# Altium PCB FreidoraAireCuki.PcbDoc
Units mil, origin at the board's own origin, x right, y up, seen from the top; angles counter-clockwise.
Board outline 3650 x 2850 mil, 2 copper layers (Top Layer, Bottom Layer); 52 components, 63 nets, 201 pads, 0 vias.
Unrouted connection lines stored in the file: 100.
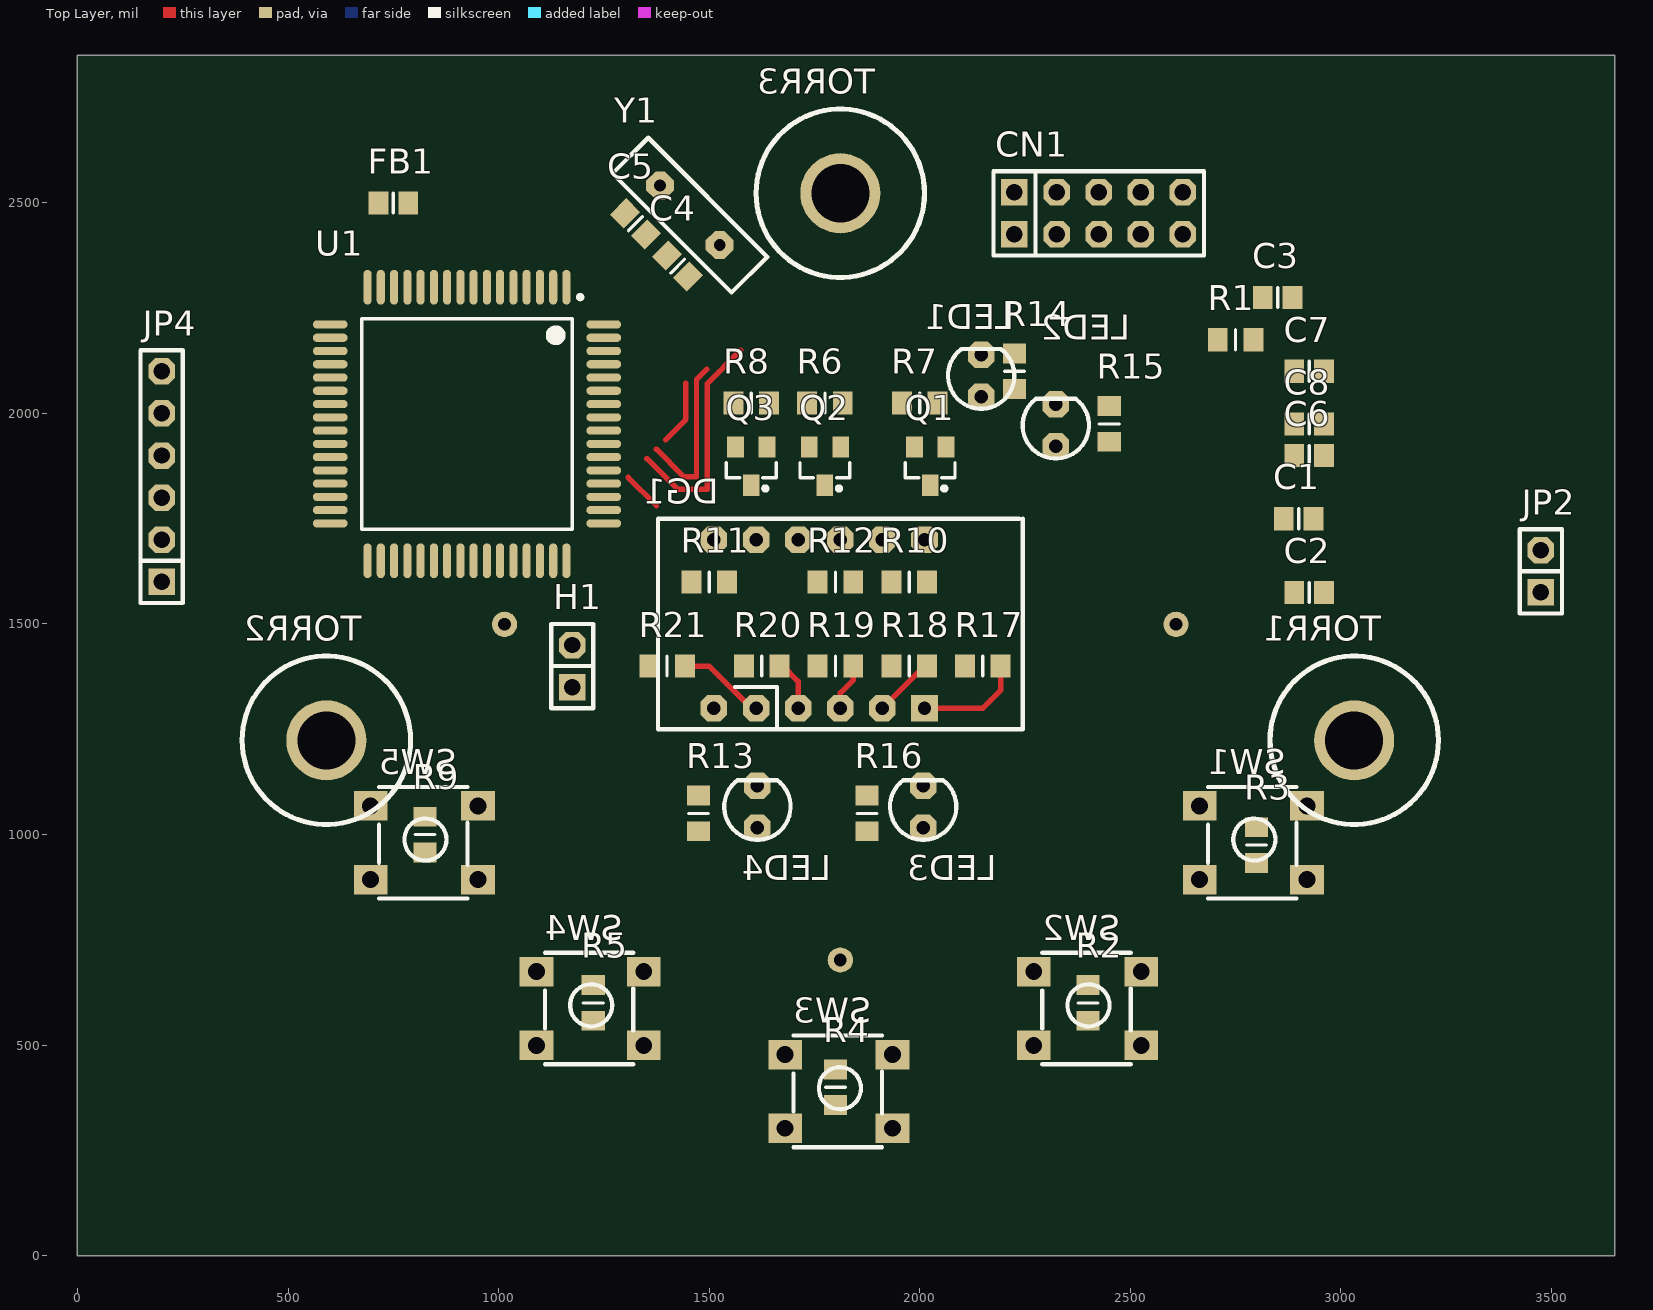
[diagram p0: Top Layer view]
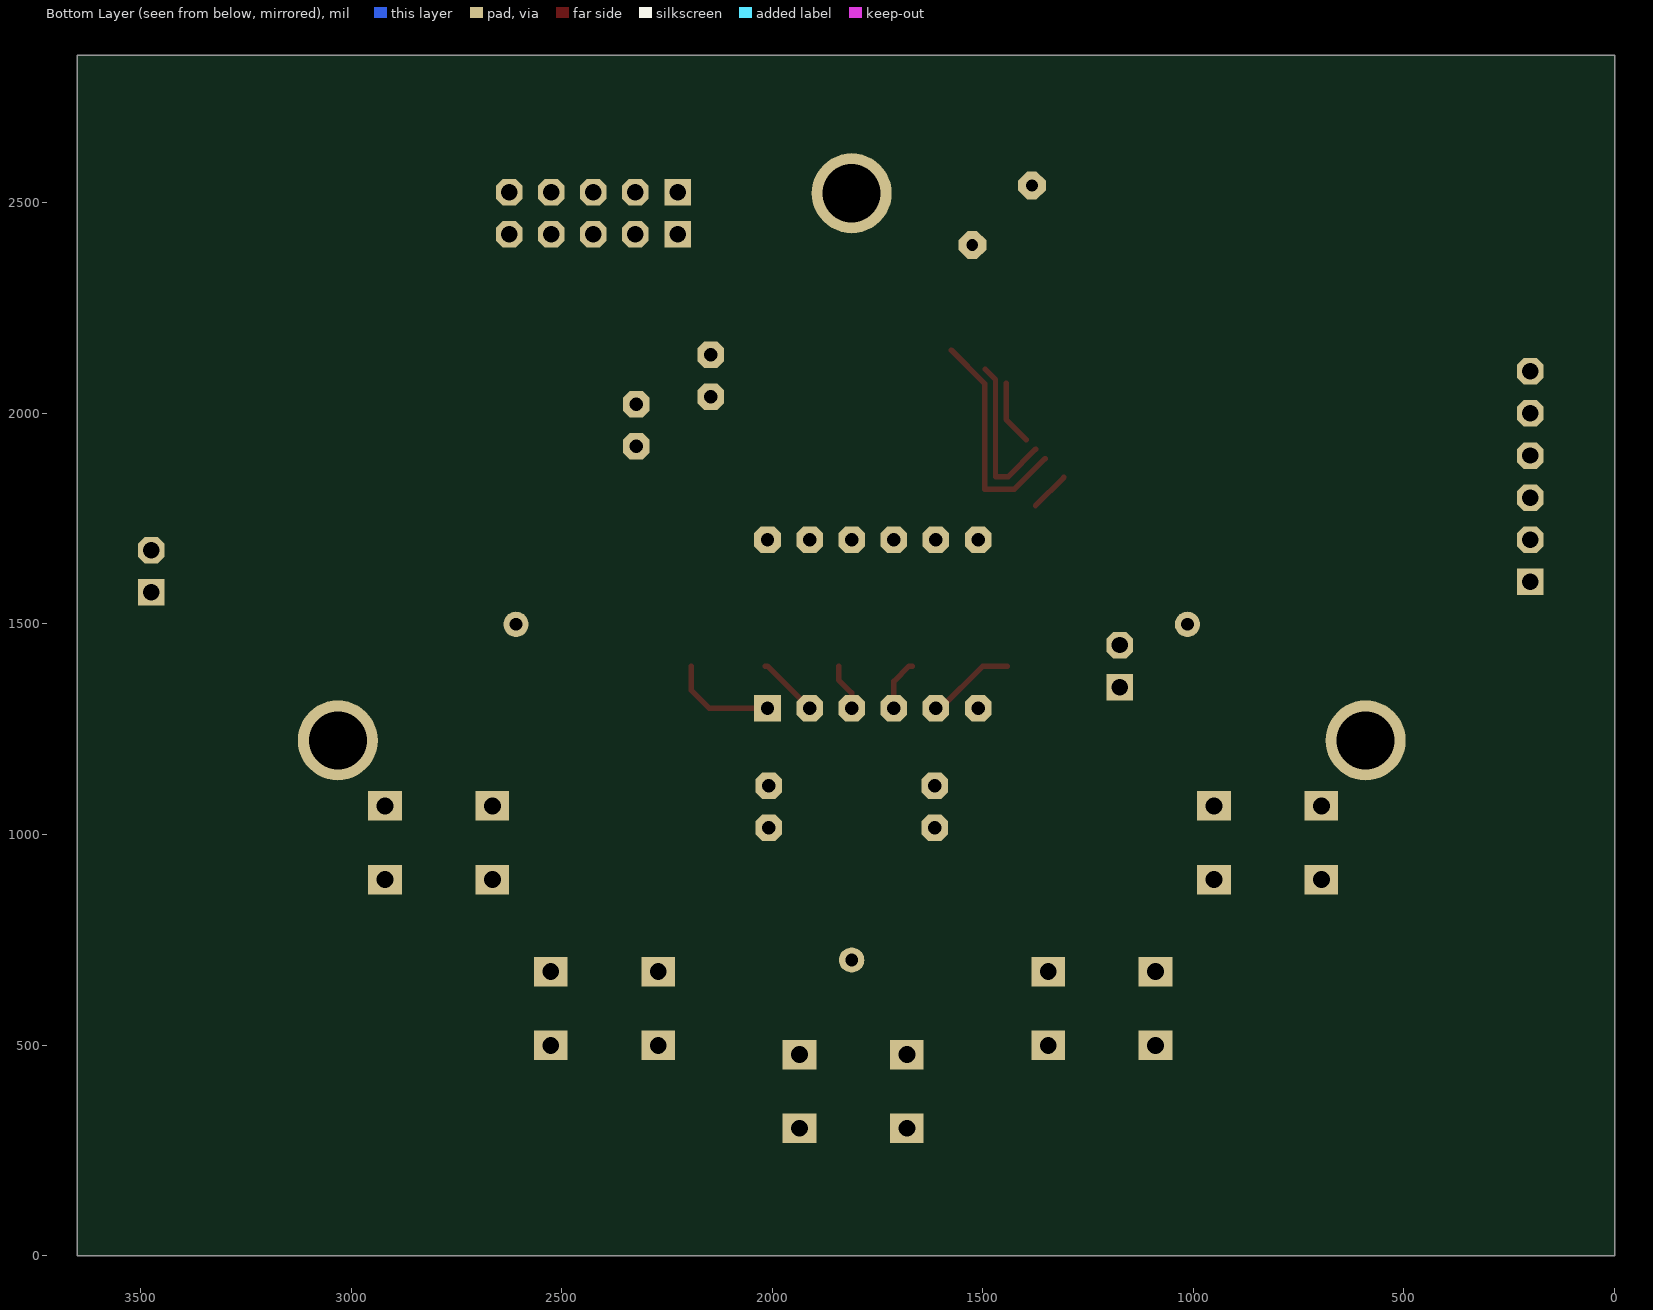
[diagram p1: Bottom Layer view, seen from below]

## Layer stack, top to bottom
Top Solder: solder mask 0.4, Solder Resist, Dk 3.5
Top Layer: signal copper 1.4
Dielectric1: dielectric 12.6, FR-4, Dk 4.8
Bottom Layer: signal copper 1.4
Bottom Solder: solder mask 0.4, Solder Resist, Dk 3.5

## Board outline
0,0 3650,0 3650,2850 0,2850

## Design rules (kind name [scope] priority, off if disabled: settings)
Clearance POLIGONOS [InPoly] p1: gap=20
Clearance [All] p2: gap=12
Clearance Clearance_1 [All] p3 off: gap=10
ComponentClearance [All] p1 off: gap=10 collisioncheckmode=3 verticalgap=10 showdistances=FALSE
FabricationTestPointUsage TestPointUsage [All] p1 off: valid=0 allowmultiple=FALSE
FabricationTestpoint Testpoint [All] p1: side=3 testpointundercomponent=TRUE minsize=40 maxsize=100 preferedsize=60 minholesize=0 maxholesize=40 preferedholesize=32 testpointgrid=1 allowsidetop=TRUE allowsidebottom=TRUE usegrid=TRUE gridtolerance=0.01
HoleSize [All] p1: absolutevalues=TRUE maxlimit=200 minlimit=1 maxpercent=80.000 minpercent=20.000
MinimumSolderMaskSliver [All] p1 off: minsoldermaskwidth=10
PlaneConnect [All] p1: planeconnectstyle=Relief reliefexpansion=20 reliefentries=4 reliefconductorwidth=14 reliefairgap=10
PolygonConnect [All] p1: connectstyle=Relief reliefconductorwidth=10 reliefentries=4 polygonreliefangle="90 Angle" airgapwidth=10
RoomDefinition FreidoraAireCuki [InComponentClass('FreidoraAireCuki')] p1: confinementstyle=ConfineIn formatcopy=TRUE lockcomponents=FALSE outline -200,-225 3825,-225 3825,2950 -200,2950
RoutingCorners [All] p1: cornerstyle=45-Degree minsetback=25 maxsetback=100
RoutingLayers [All] p1: top layer_v5=FALSE bottom layer_v5=FALSE
RoutingPriority [All] p1: routingpriority=2
RoutingVias [All] p1: holewidth=28 width=50 viastyle="Through Hole" minholewidth=28 minwidth=50 maxholewidth=28 maxwidth=55
ShortCircuit [All] p1 off: allowed=FALSE
SilkToSilkClearance [All] p1 off: silktosilkclearance=10
SilkToSolderMaskClearance SilkscreenOverComponentPads [IsPad] p1 off: minsilkscreentomaskgap=10 clearancetoexposedcopper=TRUE
SolderMaskExpansion [All] p1: expansion=4
Width "Width 39" [All] p1 off: maxlimit=300 minlimit=13 preferedwidth=39
Width "Width 96" [All] p2 off: maxlimit=300 minlimit=12 preferedwidth=96
Width "Width 19" [All] p3 off: maxlimit=300 minlimit=12 preferedwidth=19
Width "Width 300" [All] p4 off: maxlimit=300 minlimit=10 preferedwidth=300
Width "Width 12" [All] p5 off: maxlimit=300 minlimit=10 preferedwidth=12
Width "Width 65" [All] p6 off: maxlimit=300 minlimit=10 preferedwidth=65
Width "Width 150" [All] p7 off: maxlimit=300 minlimit=10 preferedwidth=150
Width "Width 26" [All] p8 off: maxlimit=300 minlimit=10 preferedwidth=26
Width "Width 13" [All] p9: maxlimit=300 minlimit=10 preferedwidth=13
Width "Width 52" [All] p10 off: maxlimit=300 minlimit=10 preferedwidth=52
18 further rules are at their usual default settings.

## Components (designator, comment, footprint, x,y, rotation, side; value= is the part's Value field where it differs from the comment)
C1 "100nF" C-0805_N 2900,1750 r0 top
C2 "100nF" C-0805_N 2925,1575 r0 top
C3 "1uF" C-0805_N 2850,2275 r0 top
C4 "22pF" C-0805_N 1425,2350 r135 top
C5 "22pF" C-0805_N 1325,2450 r315 top
C6 "100nF" C-0805_N 2925,1900 r0 top
C7 "100nF" C-0805_N 2925,2100 r0 top
C8 "100nF" C-0805_N 2925,1975 r0 top
CN1 "HEADER 2x5" SIP2X5 2225,2425 r180 top
DG1 "5121CG-HG" DIGIT_3_400 2011.42,1300 r180 top
FB1 "Ferrite bead" C-0805_N 750,2500 r0 top
H1 "NTC" SIP2 1175,1350 r90 top
JP2 "UART1" SIP2 3475,1575 r90 top
JP4 "HEADER 6" SIP6 200,1600 r90 top
LED1 "LED" LED3MM 2146.06,2089.76 r180 top
LED2 "LED" LED3MM 2323.23,1971.65 r180 top
LED3 "LED" LED3MM 2008.27,1066.14 r180 top
LED4 "LED" LED3MM 1614.57,1066.14 r180 top
Q1 "BC847" SOT23_BOTTOM 2025,1875 r270 top
Q2 "BC847" SOT23_BOTTOM 1775,1875 r270 top
Q3 "BC847" SOT23_BOTTOM 1600,1875 r270 top
R1 "10k" R-0805_N_WAVE 2750,2175 r0 top
R2 "RES1" 0805BOTTOM 2400,600 r90 top
R3 "RES1" 0805BOTTOM 2800,975 r90 top
R4 "RES1" 0805BOTTOM 1800,400 r90 top
R5 "RES1" 0805BOTTOM 1225,600 r90 top
R6 "2K7" R-0805_N_WAVE 1775,2025 r0 top
R7 "4K7" R-0805_N_WAVE 2000,2025 r180 top
R8 "2K7" R-0805_N_WAVE 1600,2025 r0 top
R9 "RES1" 0805BOTTOM 825,1000 r90 top
R10 "RES1" 0805BOTTOM 1975,1600 r180 top
R11 "RES1" 0805BOTTOM 1500,1600 r180 top
R12 "RES1" 0805BOTTOM 1800,1600 r180 top
R13 "RES1" 0805BOTTOM 1475,1050 r90 top
R14 "RES1" 0805BOTTOM 2225,2100 r90 top
R15 "RES1" 0805BOTTOM 2450,1975 r90 top
R16 "RES1" 0805BOTTOM 1875,1050 r90 top
R17 "RES1" 0805BOTTOM 2150,1400 r0 top
R18 "RES1" 0805BOTTOM 1975,1400 r0 top
R19 "RES1" 0805BOTTOM 1800,1400 r0 top
R20 "RES1" 0805BOTTOM 1625,1400 r0 top
R21 "RES1" 0805BOTTOM 1400,1400 r0 top
SW1 "-" ZIPPY-TS 2919.68,1068.11 r180 top
SW2 "+" ZIPPY-TS 2525.98,674.41 r180 top
SW3 "ON/OFF" ZIPPY-TS 1935.43,477.56 r180 top
SW4 "TIEMPO" ZIPPY-TS 1344.88,674.41 r180 top
SW5 "MODO" ZIPPY-TS 951.18,1068.11 r180 top
TORR1 "" TORRETA 3031.89,1223.62 r180 top
TORR2 "" TORRETA 590.94,1223.62 r180 top
TORR3 "" TORRETA 1811.42,2522.83 r180 top
U1 "MKE02Z64VQH4" QFP64 925,1975 r270 top
Y1 "4-20MHz" XTAL1 1525,2400 r135 top

## Footprints (in the part's own frame and the unit in brackets; to place one, negate y for a bottom-side part, rotate by r counter-clockwise, add the part's x,y. Pads: shape width x height; smd on the part's side, far side on the other; paste and mask are expansions set on the pad)
0805BOTTOM [mm] "Chip Resistor, Body 2.0x1.2mm, IPC Medium Density"
  rect 1.2x1.4 smd: 1(-1.075,0) 2(1.075,0)
  silkscreen extent 0,-0.6 0,0.6, body extent -1.07,-0.7 1.07,0.7, height 0.7
C-0805_N [mm] "Chip Capacitor, Body 2.0x1.2mm, IPC Medium Density"
  rect 1.2x1.4 smd: 1(-0.9,0) 2(0.9,0)
  silkscreen extent 0,-0.6 0,0.6, body extent -1.1,-0.72 1.1,0.73, height 1.34
DIGIT_3_400 [mil] "7 segment single digit 400"
  rect 63x63 hole 32: 1(0,0)
  oct 63x63 hole 32: 2(100,0) 3(200,0) 4(300,0) 5(400,0) 6(500,0) 7(500,-400) 8(400,-400) 9(300,-400) 10(200,-400) 11(100,-400) 12(0,-400)
  silkscreen extent -233,-450 633,50
LED3MM [mil]
  oct 63x63 hole 32: 1(0,50) 2(0,-50)
  silkscreen extent -79,-63 79,79, body extent -79,-66 79,79, height 256
QFP64 [mm] "QFP, 64-Leads, Body 14x14mm, Pitch 0.8mm, IPC Medium Density"
  oval 2.1x0.489 smd: 1(-8.25,6) 2(-8.25,5.2) 3(-8.25,4.4) 4(-8.25,3.6) 5(-8.25,2.8) 6(-8.25,2) 7(-8.25,1.2) 8(-8.25,0.4) 9(-8.25,-0.4) 10(-8.25,-1.2) 11(-8.25,-2) 12(-8.25,-2.8) 13(-8.25,-3.6) 14(-8.25,-4.4) 15(-8.25,-5.2) 16(-8.25,-6) 33(8.25,-6) 34(8.25,-5.2) 35(8.25,-4.4) 36(8.25,-3.6) 37(8.25,-2.8) 38(8.25,-2) 39(8.25,-1.2) 40(8.25,-0.4) 41(8.25,0.4) 42(8.25,1.2) 43(8.25,2) 44(8.25,2.8) 45(8.25,3.6) 46(8.25,4.4) 47(8.25,5.2) 48(8.25,6)
  oval 0.489x2.1 smd: 17(-6,-8.25) 18(-5.2,-8.25) 19(-4.4,-8.25) 20(-3.6,-8.25) 21(-2.8,-8.25) 22(-2,-8.25) 23(-1.2,-8.25) 24(-0.4,-8.25) 25(0.4,-8.25) 26(1.2,-8.25) 27(2,-8.25) 28(2.8,-8.25) 29(3.6,-8.25) 30(4.4,-8.25) 31(5.2,-8.25) 32(6,-8.25) 49(6,8.25) 50(5.2,8.25) 51(4.4,8.25) 52(3.6,8.25) 53(2.8,8.25) 54(2,8.25) 55(1.2,8.25) 56(0.4,8.25) 57(-0.4,8.25) 58(-1.2,8.25) 59(-2,8.25) 60(-2.8,8.25) 61(-3.6,8.25) 62(-4.4,8.25) 63(-5.2,8.25) 64(-6,8.25)
  silkscreen extent -7.77,-6.35 6.35,6.95, body extent -7.9,-7.9 7.9,7.9, height 2.9
R-0805_N_WAVE [mm] "Chip Resistor, Body 2.0x1.2mm, IPC Medium Density, Wave soldering"
  rect 1.2x1.4 smd: 1(-1.075,0) 2(1.075,0)
  silkscreen extent 0,-0.6 0,0.6, body extent -1.1,-0.67 1.1,0.68, height 0.69
SIP2 [mil]
  rect 63x63 hole 39: 1(0,0)
  oct 63x63 hole 39: 2(100,0)
  silkscreen extent -50,-50 150,50
SIP2X5 [mil]
  rect 63x63 hole 39: 1(0,0) 2(0,-100)
  oct 63x63 hole 39: 3(-100,0) 4(-100,-100) 5(-200,0) 6(-200,-100) 7(-300,0) 8(-300,-100) 9(-400,0) 10(-400,-100)
  silkscreen extent -450,-150 50,50, body extent -450,-148 50,48, height 336
SIP6 [mil]
  rect 63x63 hole 39: 1(0,0)
  oct 63x63 hole 39: 2(100,0) 3(200,0) 4(300,0) 5(400,0) 6(500,0)
  silkscreen extent -50,-50 550,50
SOT23_BOTTOM [mm] "SOT23, 3-Leads, Body 2.9x1.3mm, Pitch 0.95mm, Lead Span 2.3mm - Reverse Pinning, IPC Medium Density"
  rect 1.25x1 smd: 1(-1.15,0.95) 2(-1.15,-0.95)
  rect 1.3x1 smd: 3(1.17,0)
  silkscreen extent -0.2,-1.5 1.47,1.5, body extent -0.7,-1.5 0.7,1.5, height 1.1
TORRETA [mil]
  round 190 hole 137.8: 0(0,0)
  silkscreen extent -200,-200 200,200
XTAL1 [mil]
  oct 63x63 hole 28: 1(0,0) 2(200,0)
  silkscreen extent -100,-60 300,60
ZIPPY-TS [mil]
  rect 80x70 hole 40: 1(0,175) 2(0,0) 3(255,0) 4(255,175)
  silkscreen extent 25,-45 235,220

## Part data
C1 C2 C3 C4 C5 C6 C7 C8: library part CAP, "Non polarized capacitor"
CN1: library part "HEADER 5X2"
DG1: library part "DIGITO x 3 400", "Dígito 0.52' cátodo común verde"
H1 JP2: library part "HEADER 2"
Q1 Q2 Q3: "NPN transistor bipolar"
R1: library part "Res SMD 0805", "Resistor SMD 0805"
R2 R3 R4 R5 R9 R10 R11 R12 R13 R14 R15 R16 R17 R18 R19 R20 R21: "Resistor"
R6 R7 R8: library part RES, "Resistor"
SW1 SW2 SW3 SW4 SW5: library part TECLA
TORR1 TORR2 TORR3: library part TORRETA
U1: "IC MCU 32BIT 64KB FLASH 64QFP"
Y1: library part CRYSTAL, "CRYSTAL"

## Free pads (board coordinates)
  round 60 hole 30: 0(1014.17,1499.21) 0(1811.42,701.97) 0(2608.66,1499.21)

## Nets (pads, with @x,y where several pads share a name; then routed paths per layer and width w, separated by ;. In a path a pad name is that pad's centre, name@x,y a point inside that pad or via, vN(x,y) a via of type N, cw(c..) or ccw(c..) an arc to the next point about the centre after c; other vN are vias at no path point)
AGND: FB1.2
BUZZER: JP4.3 U1.57
DIG1: DG1.12 Q1.3
DIG2: DG1.9 Q2.3
DIG3: DG1.8 Q3.3
DIGITO1: R7.1 U1.20
DIGITO2: R6.1 U1.21
DIGITO3: R8.1 U1.25
FAN: JP4.4 U1.56
GND: C1.2 C2.2 C3.2 C4.1 C5.1 C6.2 C7.2 C8.2 CN1.3 CN1.5 FB1.1 JP4.1 LED1.2 LED2.2 LED3.2 LED4.2 Q1.2 Q2.2 Q3.2 SW1.2 SW2.2 SW3.2 SW4.2 SW5.2 U1.9 U1.10 U1.13 U1.40
HEAT: JP4.5 U1.55
LED1: R14.2 U1.26
LED2: R15.2 U1.5
LED3: R16.2 U1.16
LED4: R13.2 U1.17
NetC4_2: C4.2 U1.11 Y1.1
NetC5_2: C5.2 U1.12 Y1.2
NetDG1_1: DG1.1 R17.2 | length 256.1
  Top Layer w13: DG1.1 2150,1300 2192.32,1342.32 R17.2
NetDG1_2: DG1.2 R18.2 | length 147.3
  Top Layer w13: DG1.2 2011.42,1400 R18.2
NetDG1_3: DG1.3 R19.2 | length 112.8
  Top Layer w13: DG1.3 1811.42,1336.42 1842.32,1367.32 R19.2
NetDG1_4: DG1.4 R20.2 | length 122.8
  Top Layer w13: R20.2 1675,1400 1711.42,1363.58 DG1.4
NetDG1_5: DG1.5 R21.2 | length 210.5
  Top Layer w13: R21.2 1500,1400 1600,1300 DG1.5
NetDG1_7: DG1.7 R11.1
NetDG1_10: DG1.10 R12.1
NetDG1_11: DG1.11 R10.1
NetH1_2: H1.2 U1.49
NetJP2_1: JP2.1 U1.51
NetJP2_2: JP2.2 U1.52
NetLED1_1: LED1.1 R14.1
NetLED2_1: LED2.1 R15.1
NetLED3_1: LED3.1 R16.1
NetLED4_1: LED4.1 R13.1
NetQ1_1: Q1.1 R7.2
NetQ2_1: Q2.1 R6.2
NetQ3_1: Q3.1 R8.2
NetR2_1: R2.1 SW2.1 U1.32
NetR3_1: R3.1 SW1.1 U1.31
NetR4_1: R4.1 SW3.1 U1.33
NetR5_1: R5.1 SW4.1 U1.34
NetR9_1: R9.1 SW5.1 U1.61
PTA6: U1.38
PTA7: U1.37
PTD2: U1.46
PTD3: U1.45
PTD4: U1.44
PTD5: U1.24
PTD6: U1.23
PTD7: U1.22
PTE2: U1.54
PTE3: U1.53
PTE4: U1.39
RESET: C3.1 CN1.10 R1.1 U1.63 | length 388
  Top Layer w13: 1374.43,1915.09 1439.52,1850 1469.98,1850 1469.98,2080.34 1494.82,2105.18
SEG_A: R10.2 U1.18
SEG_B: R11.2 U1.19
SEG_C: R20.1 U1.59
SEG_D: R18.1 U1.60 | length 95.3
  Top Layer w13: 1307.62,1848.28 1375,1780.9
SEG_DP: R19.1 U1.2
SEG_E: R17.1 U1.14
SEG_F: R12.2 U1.15
SEG_G: R21.1 U1.1
SWDCLK: CN1.4 U1.62 | length 536.2
  Top Layer w13: 1352.16,1892.82 1425,1819.98 1494.98,1819.98 1494.98,2069.98 1575,2150
SWDIO: CN1.2 U1.64 | length 153.8
  Top Layer w13: 1396.7,1937.36 1444.98,1985.64 1444.98,2071.14
VCC: C1.1 C2.1 C6.1 C7.1 C8.1 CN1.1 H1.1 JP4.2 R1.2 R2.2 R3.2 R4.2 R5.2 R9.2 U1.7 U1.8 U1.41
pads on no net: CN1.6 CN1.7 CN1.8 CN1.9 DG1.6 JP4.6 SW1.3 SW1.4 SW2.3 SW2.4 SW3.3 SW3.4 SW4.3 SW4.4 SW5.3 SW5.4 TORR1.0 TORR2.0 TORR3.0 U1.3 U1.4 U1.6 U1.27 U1.28 U1.29 U1.30 U1.35 U1.36 U1.42 U1.43 U1.47 U1.48 U1.50 U1.58

## Silkscreen, mask and mechanical layers (free items; w line width, h text height)
Mechanical 13:
  circle w10: c1693.31,2168.5 r39.37
  circle w10: c1929.53,2168.5 r39.37
  circle w10: c1476.77,2089.76 r39.37
  circle w10: c2146.06,2089.76 r39.37
  circle w10: c1299.61,1971.65 r39.37
  circle w10: c2323.23,1971.65 r39.37
  circle w10: c1014.17,1499.21 r19.68
  circle w10: c1811.42,701.97 r19.68
  circle w10: c2608.66,1499.21 r19.68
  circle w10: c1811.42,1499.21 r797.24
  circle w10: c1811.42,1971.65 r39.37
  circle w10: c1614.57,1066.14 r39.37
  circle w10: c2008.27,1066.14 r39.37
  circle w10: c2795.67,987.4 r39.37
  circle w10: c827.17,987.4 r39.37
  circle w10: c1220.87,593.7 r39.37
  circle w10: c2401.97,593.7 r39.37
  circle w10: c1811.42,396.85 r39.37
  circle w10: c1811.42,2522.83 r118.11
  circle w10: c3031.89,1223.62 r118.11
  circle w10: c590.94,1223.62 r118.11
  circle w10: c590.94,1223.62 r68.9
  circle w10: c3031.89,1223.62 r68.9
  circle w10: c1811.42,2522.83 r68.9
  lines w10: 472.83,1050 472.83,2122.83 475,2125 ; 472.83,1075 ccw(c1348.92,1076.08) 1350,200 ; 472.83,1975 cw(c1210.33,2037.5) 785.81,2643.79 ; 748.43,987.4 905.91,987.4 ; 784.06,2640.94 2840.94,2640.94 ; 827.17,908.66 827.17,1066.14 ; 1142.13,593.7 1299.61,593.7 ; 1220.87,525 1220.87,675 ; 1300,200 2350,200 ; 1675,1499.21 1975,1499.21 ; 1772.05,396.85 1850.79,396.85 ; 1811.42,300 1811.42,475 ; 1811.42,1400 1811.42,1575 ; 2272.83,200 ccw(c2273.92,1076.08) 3150,1075 ; 2323.23,593.7 2480.71,593.7 ; 2401.97,525 2401.97,653.15 ; 2716.93,987.4 2874.41,987.4 ; 2795.67,908.66 2795.67,1066.14 ; 2837.03,2643.79 cw(c2412.5,2037.5) 3150,1975 ; 3150,1050 3150,2075 ; 1368.5,1223.62 1368.5,1774.8 2254.33,1774.8 2254.33,1223.62 1368.5,1223.62